# EAGLE board Arduino MEGA Buzzer shield 2 (EAGLE 8.7.1)
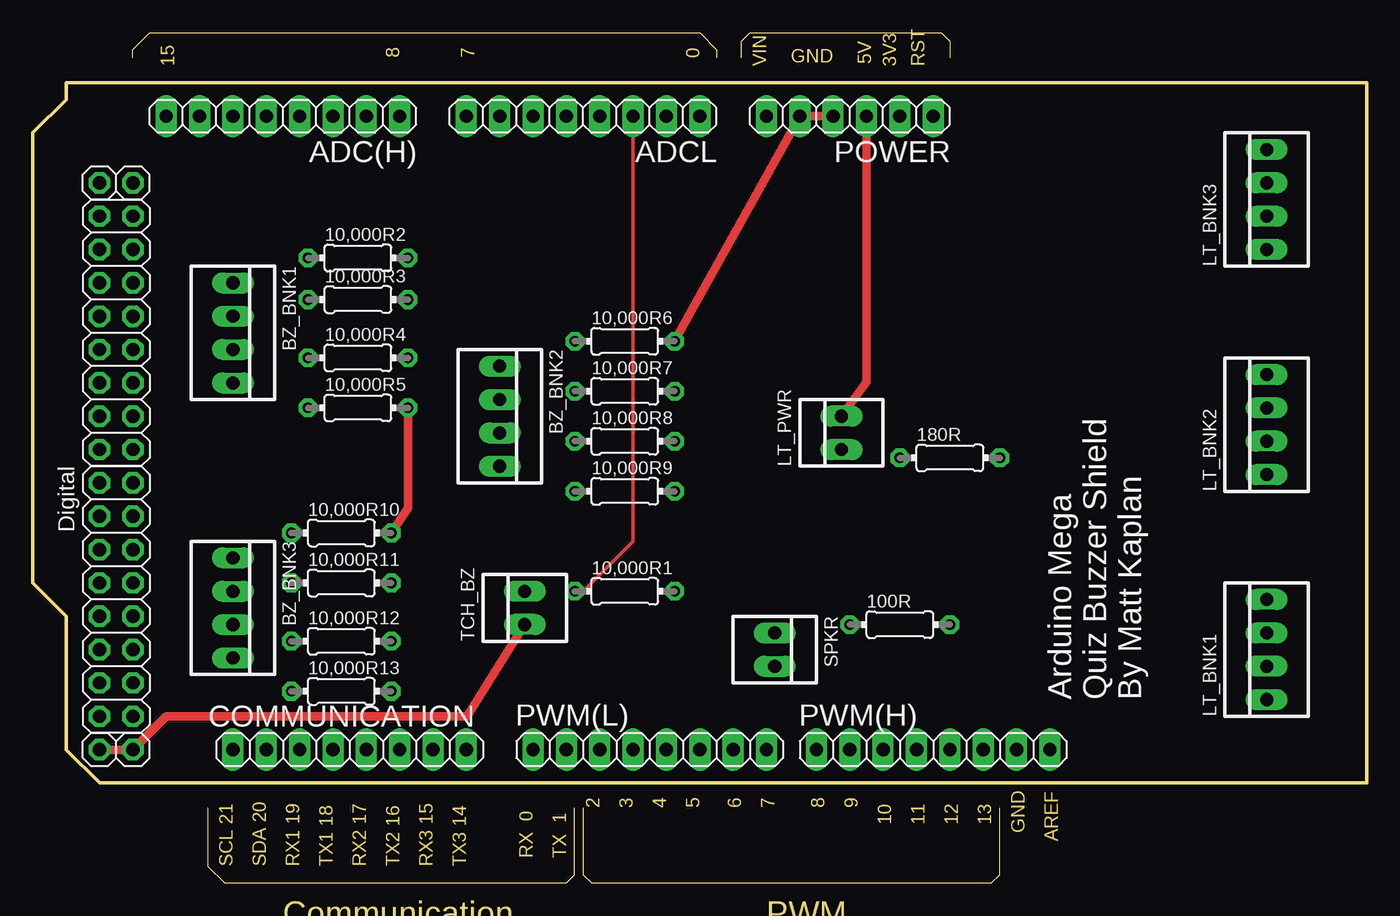
[diagram p0: board, top side]
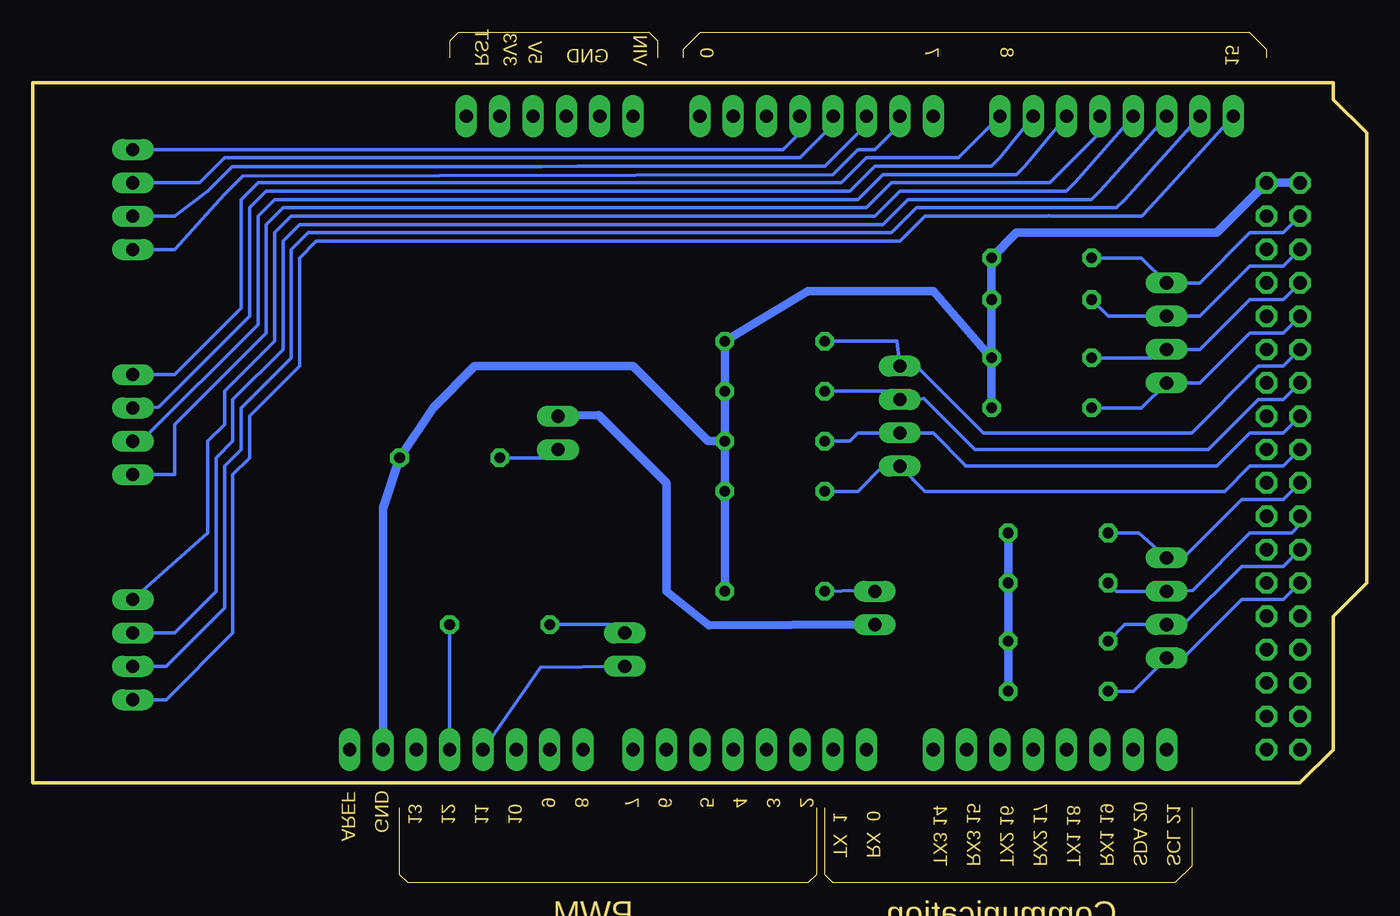
[diagram p1: board, bottom side, seen from below]

Size 101.6 x 64.77 mm. Coordinates in mm from the lower left corner, seen from the top.
Outline: 7.62,62.87 7.62,63.5 8.89,64.77 50.8,64.77 52.07,63.5 52.07,62.87
Outline: 53.98,62.87 53.98,64.13 54.61,64.77 69.22,64.77 69.85,64.13 69.85,62.87
Outline: 13.34,5.71 13.34,1.27 14.61,0 40.64,0 41.27,0.64 41.27,5.71
Outline: 41.91,5.71 41.91,0.64 42.55,0 73.03,0 73.66,0.64 73.66,5.71
Outline: 101.6,7.62 5.08,7.62 2.54,10.16 2.54,20.32 0,22.86 0,57.15 2.54,59.69 2.54,60.96 101.6,60.96 101.6,7.62
Copper layers (1*16): Top 0.035mm / dielectric 1.5mm / Bottom 0.035mm
Design rules "SparkFun": minimum track width 8mil, minimum drill 20mil, track to track 8mil, track to pad 8mil, pad to pad 8mil, via to via 8mil, smd to smd 8mil, copper to edge 8mil, drill to drill 8mil, minimum pad ring 12mil, minimum via ring 10mil, stop-mask expansion 4mil, vias tented up to drill 20mil, thermal gap 10mil
Net classes: 0 default: width 0.203 mm, drill 0.406 mm, clearance 0.203 mm; 1 power: width 0.61 mm, drill 0.711 mm, clearance 0.203 mm; 2 gnd: width 0.305 mm, drill 0.711 mm, clearance 0.203 mm; 3 usbvcc: width 0.508 mm, drill 0.711 mm, clearance 0.203 mm

## Footprints (pad centres in the part's own frame; a part is rotated, then mirrored left to right if it is on the bottom)
0204/7 = drill 0.813 octagon: 1 -3.81,0; 2 3.81,0
1X08 = drill 1.016 long: 1 -8.89,0; 2 -6.35,0; 3 -3.81,0; 4 -1.27,0; 5 1.27,0; 6 3.81,0; 7 6.35,0; 8 8.89,0
22-23-2041 = drill 1 long: 1 -3.81,0; 2 -1.27,0; 3 1.27,0; 4 3.81,0
2X08 = drill 1.016 octagon: 1 -8.89,-1.27; 2 -8.89,1.27; 3 -6.35,-1.27; 4 -6.35,1.27; 5 -3.81,-1.27; 6 -3.81,1.27; 7 -1.27,-1.27; 8 -1.27,1.27; 9 1.27,-1.27; 10 1.27,1.27; 11 3.81,-1.27; 12 3.81,1.27; 13 6.35,-1.27; 14 6.35,1.27; 15 8.89,-1.27; 16 8.89,1.27
1X01 = drill 1.016 octagon: 1 0,0
22-23-2021 = drill 1 long: 1 -1.27,0; 2 1.27,0
1X06 = drill 1.016 long: 1 -6.35,0; 2 -3.81,0; 3 -1.27,0; 4 1.27,0; 5 3.81,0; 6 6.35,0

## Placement (x,y rotation side)
10,000R1  [0204/7]  45.09,22.23 0 top
10,000R2  [0204/7]  24.77,47.63 0 top
10,000R3  [0204/7]  24.77,44.45 0 top
10,000R4  [0204/7]  24.77,40.01 0 top
10,000R5  [0204/7]  24.77,36.2 0 top
10,000R6  [0204/7]  45.09,41.27 0 top
10,000R7  [0204/7]  45.09,37.47 0 top
10,000R8  [0204/7]  45.09,33.66 0 top
10,000R9  [0204/7]  45.09,29.84 0 top
10,000R10  [0204/7]  23.5,26.67 0 top
10,000R11  [0204/7]  23.5,22.86 0 top
10,000R12  [0204/7]  23.5,18.41 0 top
10,000R13  [0204/7]  23.5,14.61 0 top
100R  [0204/7]  66.04,19.69 0 top
180R  [0204/7]  69.85,32.38 0 top
ADC(H)  [1X08]  19.05,58.42 180 top
ADCL  [1X08]  41.91,58.42 180 top
BZ_BNK1  [22-23-2041]  15.24,41.91 270 top
BZ_BNK2  [22-23-2041]  35.56,35.56 270 top
BZ_BNK3  [22-23-2041]  15.24,20.95 270 top
COMMUNICATION  [1X08]  24.13,10.16 0 top
JP1  Digital  [2X08]  6.35,21.59 270 top
JP2  Digital  [2X08]  6.35,41.91 270 top
JP3  [1X01]  7.62,10.16 180 top
JP4  [1X01]  5.08,10.16 180 top
JP5  [1X01]  7.62,53.34 180 top
JP6  [1X01]  5.08,53.34 180 top
LT_BNK1  [22-23-2041]  93.98,17.78 90 top
LT_BNK2  [22-23-2041]  93.98,34.93 90 top
LT_BNK3  [22-23-2041]  93.98,52.07 90 top
LT_PWR  [22-23-2021]  61.59,34.29 90 top
POWER  [1X06]  62.23,58.42 180 top
PWM(H)  [1X08]  68.58,10.16 0 top
PWM(L)  [1X08]  46.99,10.16 0 top
SPKR  [22-23-2021]  56.52,17.78 270 top
TCH_BZ  [22-23-2021]  37.47,20.95 90 top

## Library data of the parts
10,000R1-10,000R13 100R 180R = eagle-ltspice; SPICEMODEL: NONE; SPICEPREFIX: R
ADC(H) ADCL COMMUNICATION JP1-JP6 POWER PWM(H) PWM(L) = pinhead
BZ_BNK1-BZ_BNK3 LT_BNK1-LT_BNK3 = con-molex; MF: MOLEX; MPN: 22-23-2041; OC_FARNELL: 1462920; OC_NEWARK: 38C0355
LT_PWR SPKR TCH_BZ = con-molex; MF: MOLEX; MPN: 22-23-2021; OC_FARNELL: 1462926; OC_NEWARK: 25C3832

## Nets
+3V3 [power]: POWER.2
+5V [usbvcc]: JP3.1 JP4.1 LT_PWR.2 POWER.3 TCH_BZ.1
ADC0: ADCL.1
ADC1: ADCL.2
ADC2: 10,000R1.1 ADCL.3 TCH_BZ.2
ADC3: ADCL.4 LT_BNK3.4
ADC4: ADCL.5 LT_BNK3.3
ADC5: ADCL.6 LT_BNK3.2
ADC6: ADCL.7 LT_BNK3.1
ADC7: ADCL.8
ADC8: ADC(H).1 LT_BNK2.4
ADC9: ADC(H).2 LT_BNK2.3
ADC10: ADC(H).3 LT_BNK2.2
ADC11: ADC(H).4 LT_BNK2.1
ADC12: ADC(H).5 LT_BNK1.4
ADC13: ADC(H).6 LT_BNK1.3
ADC14: ADC(H).7 LT_BNK1.2
ADC15: ADC(H).8 LT_BNK1.1
AREF: PWM(H).8
DIG22: JP1.16
DIG23: JP1.15
DIG24: JP1.14
DIG25: JP1.13
DIG26 [gnd]: JP1.12
DIG27: JP1.11
DIG28: JP1.10
DIG29: JP1.9
DIG30: JP1.8
DIG31: 10,000R13.1 BZ_BNK3.4 JP1.7
DIG32: JP1.6
DIG33: 10,000R12.1 BZ_BNK3.3 JP1.5
DIG34: JP1.4
DIG35: 10,000R11.1 BZ_BNK3.2 JP1.3
DIG36: JP1.2
DIG37: 10,000R10.1 BZ_BNK3.1 JP1.1
DIG38: JP2.16
DIG39: 10,000R9.1 BZ_BNK2.4 JP2.15
DIG40: JP2.14
DIG41: 10,000R8.1 BZ_BNK2.3 JP2.13
DIG42: JP2.12
DIG43: 10,000R7.1 BZ_BNK2.2 JP2.11
DIG44: JP2.10
DIG45: 10,000R6.1 BZ_BNK2.1 JP2.9
DIG46: JP2.8
DIG47: 10,000R5.1 BZ_BNK1.4 JP2.7
DIG48: JP2.6
DIG49: 10,000R4.1 BZ_BNK1.3 JP2.5
DIG50: JP2.4
DIG51: 10,000R3.1 BZ_BNK1.2 JP2.3
DIG52: JP2.2
DIG53: 10,000R2.1 BZ_BNK1.1 JP2.1
GND [gnd]: 10,000R1.2 10,000R2.2 10,000R3.2 10,000R4.2 10,000R5.2 10,000R6.2 10,000R7.2 10,000R8.2 10,000R9.2 10,000R10.2 10,000R11.2 10,000R12.2 10,000R13.2 180R.2 JP5.1 JP6.1 POWER.4 POWER.5 PWM(H).7
N$2: 180R.1 LT_PWR.1
PWM00: PWM(L).1
PWM01: PWM(L).2
PWM02: PWM(L).3
PWM03: PWM(L).4
PWM04: PWM(L).5
PWM05: PWM(L).6
PWM06: PWM(L).7
PWM07: PWM(L).8
PWM08: PWM(H).1
PWM09: PWM(H).2
PWM10: PWM(H).3
PWM11: PWM(H).4 SPKR.2
PWM12: 100R.2 PWM(H).5
PWM13: PWM(H).6
RESET: POWER.1
RX1_D19: COMMUNICATION.3
RX2_D17: COMMUNICATION.5
RX3_D15: COMMUNICATION.7
RX4_D14: COMMUNICATION.8
SCL_D21: COMMUNICATION.1
SDA_D20: COMMUNICATION.2
SPKR$1: 100R.1 SPKR.1
TX1_D18: COMMUNICATION.4
TX2_D16: COMMUNICATION.6
VIN [power]: POWER.6

## Tracks (layer width: path | path; a pad name or v marks a point on that pad's centre or on a via)
+5V
  Top 0.635: LT_PWR.2 63.5,38.18 POWER.3 | TCH_BZ.1 33.09,12.7 10.16,12.7 JP3.1 JP4.1
  Bottom 0.635: TCH_BZ.1 50.09,19.61 53.34,22.23 53.34,30.48 58.5,35.63 LT_PWR.2
ADC2
  Top 0.254: 10,000R1.1 41.91,22.23 45.72,26.04 ADCL.3
  Bottom 0.254: TCH_BZ.2 38.66,22.3 10,000R1.1
ADC3
  Bottom 0.254: ADCL.4 43.18,57.15 44.45,55.88 LT_BNK3.4
ADC4
  Bottom 0.254: ADCL.5 40.64,57.79 43.18,55.24 87,55.24 88.9,53.34 LT_BNK3.3
ADC5
  Bottom 0.254: LT_BNK3.2 90.81,50.8 88.27,52.71 86.4,54.57 62.86,54.57 60.09,54.61 41.27,54.61 38.1,57.79 ADCL.6
ADC6
  Bottom 0.254: LT_BNK3.1 90.81,48.26 87,52.48 85.61,53.86 40.64,53.98 38.73,55.88 37.47,55.88 35.56,57.79 ADCL.7
ADC8
  Bottom 0.254: LT_BNK2.4 90.81,38.74 85.72,43.82 85.72,52.07 84.45,53.34 40.01,53.34 38.1,55.24 31.12,55.24 ADC(H).1
ADC9
  Bottom 0.254: ADC(H).2 27.94,55.24 28.58,54.61 37.47,54.61 39.37,52.71 83.82,52.71 85.09,51.43 85.09,43.18 92,36.27 LT_BNK2.3
ADC10
  Bottom 0.254: ADC(H).3 26.04,54.61 26.67,53.98 36.83,53.98 38.73,52.07 83.19,52.07 84.45,50.8 84.45,42.54 93.34,33.66 LT_BNK2.2
ADC11
  Bottom 0.254: LT_BNK2.1 90.81,31.12 90.81,34.93 83.82,41.91 83.82,50.16 82.55,51.43 38.1,51.43 36.2,53.34 24.13,53.34 20.32,57.15 ADC(H).4
ADC12
  Bottom 0.254: ADC(H).5 22.23,53.34 22.86,52.71 35.56,52.71 37.47,50.8 81.91,50.8 83.19,49.53 83.19,41.27 87,37.47 87,34.93 88.27,33.66 88.27,26.67 LT_BNK1.4
ADC13
  Bottom 0.254: ADC(H).6 20.32,52.71 20.96,52.07 34.92,52.07 36.83,50.16 81.28,50.16 82.55,48.9 82.55,40.64 86.36,36.83 86.36,33.66 87.63,32.38 87.63,22.23 90.81,19.05 LT_BNK1.3
ADC14
  Bottom 0.254: ADC(H).7 18.42,52.07 19.05,51.43 34.29,51.43 36.2,49.53 80.64,49.53 81.91,48.26 81.91,40.01 85.72,36.2 85.72,33.02 87,31.75 87,20.95 91.44,16.51 LT_BNK1.2
ADC15
  Bottom 0.254: ADC(H).8 16.51,51.43 17.13,50.81 24.04,50.81 24.22,50.86 24.3,50.81 33.64,50.81 35.56,48.9 80.01,48.9 81.28,47.63 81.28,39.37 85.09,35.56 85.09,32.38 86.36,31.12 86.36,19.05 91.44,13.97 LT_BNK1.1
DIG31
  Bottom 0.254: JP1.7 6.35,21.59 9.52,21.59 13.97,17.15 BZ_BNK3.4 17.78,14.61 10,000R13.1
DIG33
  Bottom 0.254: 5.72,25.4 JP1.5 6.35,24.13 9.52,24.13 13.97,19.69 BZ_BNK3.3 18.42,19.69 10,000R12.1
DIG35
  Bottom 0.254: JP1.3 5.08,27.3 5.72,26.67 8.89,26.67 13.26,22.3 BZ_BNK3.2 19.05,22.23 10,000R11.1
DIG37
  Bottom 0.254: 10,000R10.1 17.37,26.67 BZ_BNK3.1 13.97,24.77 9.52,29.21 6.35,29.21 JP1.1
DIG39
  Bottom 0.254: JP2.15 6.35,31.75 8.89,31.75 10.8,29.84 33.66,29.84 BZ_BNK2.4 36.83,31.75 38.73,29.84 10,000R9.1
DIG41
  Bottom 0.254: JP2.13 6.35,34.29 8.89,34.29 11.43,31.75 30.55,31.75 30.55,31.83 33.02,34.29 BZ_BNK2.3 38.73,34.29 39.37,33.66 10,000R8.1
DIG43
  Bottom 0.254: JP2.11 6.35,36.83 8.26,36.83 12.06,33.02 29.85,33.02 33.73,36.91 BZ_BNK2.2 36.12,37.54 36.2,37.47 10,000R7.1
DIG45
  Bottom 0.254: JP2.9 6.35,39.37 8.26,39.37 13.34,34.29 29.21,34.29 34.29,39.37 BZ_BNK2.1 35.79,41.27 10,000R6.1
DIG47
  Bottom 0.254: JP2.7 6.35,41.91 8.89,41.91 12.7,38.1 BZ_BNK1.4 17.15,36.2 10,000R5.1
DIG49
  Bottom 0.254: JP2.5 6.35,44.45 8.89,44.45 12.7,40.64 BZ_BNK1.3 15.88,40.01 10,000R4.1
DIG51
  Bottom 0.254: JP2.3 6.35,46.99 8.89,46.99 12.7,43.18 BZ_BNK1.2 19.69,43.18 10,000R3.1
DIG53
  Bottom 0.254: 10,000R2.1 17.15,47.63 BZ_BNK1.1 12.7,45.72 8.89,49.53 6.35,49.53 JP2.1
GND
  Top 0.635: POWER.4 POWER.5 10,000R6.2 | 10,000R10.2 28.58,28.58 10,000R5.2
  Bottom 0.635: 10,000R4.2 10,000R3.2 10,000R2.2 26.67,49.53 11.43,49.53 JP5.1 JP6.1 | 10,000R4.2 10,000R5.2 | 10,000R10.2 10,000R11.2 10,000R12.2 10,000R13.2 | 10,000R8.2 10,000R9.2 10,000R1.2 | 10,000R8.2 10,000R7.2 10,000R6.2 42.55,45.09 33.02,45.09 10,000R4.2 | 10,000R8.2 50.16,33.66 55.88,39.37 67.94,39.37 71.12,36.2 180R.2 74.93,28.58 PWM(H).7
N$2
  Bottom 0.254: LT_PWR.1 61.67,32.38 180R.1
PWM11
  Bottom 0.254: 67.31,11.43 PWM(H).4 62.94,16.44 SPKR.2
PWM12
  Bottom 0.254: 100R.2 PWM(H).5
SPKR$1
  Bottom 0.254: SPKR.1 56.44,19.69 100R.1

## Text on the board
Dimension: 5V | 3V3 | GND | 15 | 8 | 7 | 0 | VIN | RST | 2 | 3 | 4 | 5 | 6 | 7 | 8 | 9 | 10 | 11 | 12 | 13 | GND | AREF | SCL 21 | SDA 20 | RX1 19 | TX1 18 | RX2 17 | TX2 16 | RX3 15 | TX3 14 | RX 0 | TX 1 | Communication | PWM
tPlace: Arduino Mega / Quiz Buzzer Shield / By Matt Kaplan
tOrigins: Analog In | Power